# EAGLE board USB-to-RS485-Dynamixel_1.0 (EAGLE 7.6.0)
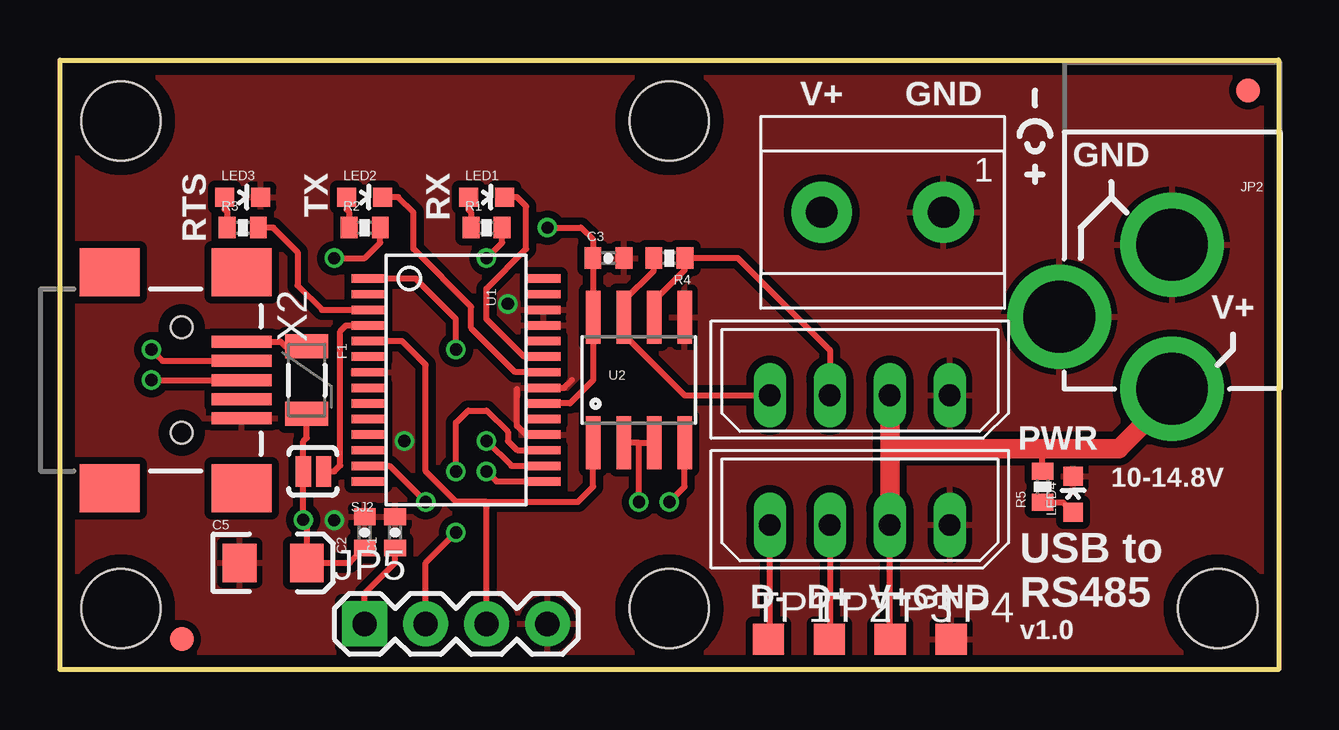
[diagram p0: board, top side]
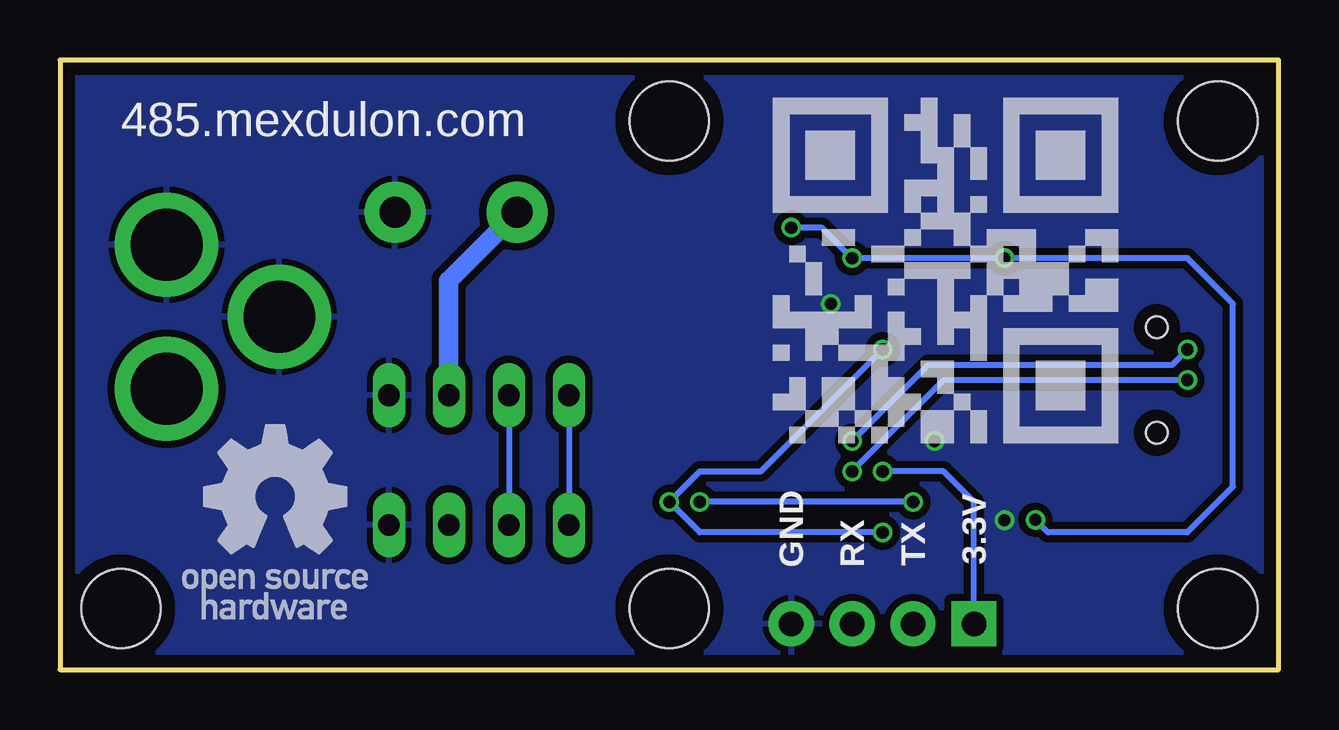
[diagram p1: board, bottom side, seen from below]

Size 50.8 x 25.4 mm. Coordinates in mm from the lower left corner, seen from the top.
Outline: 50.8,0 0,0 0,25.4 50.8,25.4 50.8,0
Copper layers (1*16): Top 0.035mm / dielectric 1.6mm / Bottom 0.035mm
Design rules "Elecrow_2-layer_PCB_eagle_rule": minimum track width 6mil, minimum drill 12mil, track to track 6mil, track to pad 6mil, pad to pad 6mil, via to via 8mil, smd to smd 0mil, copper to edge 20mil, drill to drill 10mil, minimum pad ring 6mil, minimum via ring 6mil, stop-mask expansion 0mil, vias tented up to drill 100mil, thermal gap 10mil
Net classes: 0 default: width 0.203 mm; 1 power: width 0.254 mm

## Footprints (pad centres in the part's own frame; a part is rotated, then mirrored left to right if it is on the bottom)
0402-CAP = smd 0.7 x 0.9: 1 -0.65,0; 2 0.65,0
EIA3216 = smd 1.4 x 1.6: A 1.4,0; C -1.4,0
PTC-1206 = smd 1 x 1.8: 1 -1.4,0; 2 1.4,0
STAND-OFF = hole 3.302: 0,0
POWER_JACK_PTH = drill 2.997 pad 4.318: GND 0,7.7; GNDBREAK 4.7,10.7; PWR 0,13.7
1X02_BIG_5.08 = drill 1.3 pad 2.54: 1 -2.54,0; 2 2.54,0
1X04 = drill 1.016 pad 1.88 square: 1 0,0 | drill 1.016 pad 1.88: 2 2.54,0; 3 5.08,0; 4 7.62,0
FIDUCIAL-1X2 = smd 1 x 1: 1 0,0
LED-0603 = smd 0.8 x 0.8: A 0,-0.75; C 0,0.75
MOLEX-22035045 = drill 0.9 long: P$1 -3.75,0; P$2 -1.25,0; P$3 1.25,0; P$4 3.75,0
0402-RES = smd 0.7 x 0.9: 1 -0.65,0; 2 0.65,0
SJ_2S-NOTRACE = smd 0.635 x 1.27: 1 -0.45,0; 2 0.4,0
TP13SQ = smd 1.3 x 1.3: TP 0,0
SSOP28DB = smd 0.348 x 1.397: 1 -4.225,-3.656; 2 -3.575,-3.656; 3 -2.925,-3.656; 4 -2.275,-3.656; 5 -1.625,-3.656; 6 -0.975,-3.656; 7 -0.325,-3.656; 8 0.325,-3.656; 9 0.975,-3.656; 10 1.625,-3.656; 11 2.275,-3.656; 12 2.925,-3.656; 13 3.575,-3.656; 14 4.225,-3.656; 15 4.225,3.656; 16 3.575,3.656; 17 2.925,3.656; 18 2.275,3.656; 19 1.625,3.656; 20 0.975,3.656; 21 0.325,3.656; 22 -0.325,3.656; 23 -0.975,3.656; 24 -1.625,3.656; 25 -2.275,3.656; 26 -2.925,3.656; 27 -3.575,3.656; 28 -4.225,3.656
SO08 = smd 0.61 x 2.21: 1 -1.905,-2.616; 2 -0.635,-2.616; 3 0.635,-2.616; 4 1.905,-2.616; 5 1.905,2.616; 6 0.635,2.616; 7 -0.635,2.616; 8 -1.905,2.616
USB-MINIB = smd 2.5 x 0.5: D+ 2.5,0; D- 2.5,0.8; GND 2.5,-1.6; ID 2.5,-0.8; VBUS 2.5,1.6 | smd 2.5 x 2: GND@1 -3,-4.5; GND@2 -3,4.5; GND@3 2.5,4.5; GND@4 2.5,-4.5 | hole 0.9: 0,2.2; 0,-2.2

## Placement (x,y rotation side)
C1  0.1uF  [0402-CAP]  13.97,5.71 90 top
C2  0.1uF  [0402-CAP]  12.7,5.71 90 top
C3  0.1uF  [0402-CAP]  22.86,17.14 0 top
C5  10uF  [EIA3216]  8.89,4.45 0 top
F1  500mA  [PTC-1206]  10.29,12.06 270 top
JP1  STAND-OFF  [STAND-OFF]  2.54,22.86 0 top
JP2  POWER_JACKPTH  [POWER_JACK_PTH]  46.35,25.4 180 top
JP3  STAND-OFF  [STAND-OFF]  48.26,2.54 0 top
JP4  Power  [1X02_BIG_5.08]  34.29,19.05 180 top
JP5  [1X04]  12.7,1.91 0 top
JP6  STAND-OFF  [STAND-OFF]  2.54,2.54 0 top
JP7  STAND-OFF  [STAND-OFF]  25.4,22.86 0 top
JP8  STAND-OFF  [STAND-OFF]  25.4,2.54 0 top
JP9  FIDUCIAL1X2  [FIDUCIAL-1X2]  5.08,1.27 0 top
JP10  FIDUCIAL1X2  [FIDUCIAL-1X2]  49.53,24.13 0 top
LED1  Red  [LED-0603]  17.78,19.68 270 top
LED2  Green  [LED-0603]  12.7,19.68 270 top
LED3  Green  [LED-0603]  7.62,19.68 270 top
LED4  Green  [LED-0603]  42.23,7.3 0 top
P1  CON-4-  [MOLEX-22035045]  33.34,11.43 180 top
P2  CON-4-  [MOLEX-22035045]  33.34,6.03 180 top
R1  330  [0402-RES]  17.78,18.41 0 top
R2  330  [0402-RES]  12.7,18.41 0 top
R3  330  [0402-RES]  7.62,18.41 0 top
R4  220  [0402-RES]  25.4,17.14 180 top
R5  1k  [0402-RES]  40.96,7.62 90 top
SJ2  SOLDERJUMPERNC2  [SJ_2S-NOTRACE]  10.54,8.26 180 top
TP1  TPSTP13SQ  [TP13SQ]  29.53,1.27 0 top
TP2  TPSTP13SQ  [TP13SQ]  32.07,1.27 0 top
TP3  TPSTP13SQ  [TP13SQ]  34.61,1.27 0 top
TP4  TPSTP13SQ  [TP13SQ]  37.15,1.27 0 top
U1  FT232R  [SSOP28DB]  16.51,12.06 270 top
U2  RS485  [SO08]  24.13,12.06 0 top
U$1  CREATIVE_COMMONS  [CREATIVE_COMMONS]  20.32,-8.89 0 top  (outside the outline)
X2  USBSMD  [USB-MINIB]  5.08,12.06 0 top

## Library data of the parts
C1-C3 C5 F1 JP1 JP3 JP5-JP10 LED1-LED4 R1-R5 SJ2 U1 U2 U$1 X2 = SparkFun
JP2 = SparkFun-Connectors; PROD_ID: CONN-08197
JP4 = SparkFun-Connectors
P1 P2 = 01-my-con
TP1-TP4 = testpad

## Nets
3.3V [power]: C1.1 JP5.1 U1.17
A: P1.P$3 P2.P$3 R4.1 TP2.TP U2.6
B: P1.P$4 P2.P$4 R4.2 TP1.TP U2.7
CTS: U1.11
DCD: U1.10
DSR: U1.9
DTR: U1.2
GND [power]: C1.2 C2.2 C3.2 C5.C JP2.GND JP2.GNDBREAK JP4.1 JP5.4 LED3.C LED4.C P1.P$1 P2.P$1 TP4.TP U1.7 U1.18 U1.21 U1.25 U1.26 U2.5 X2.GND
N$1: LED1.A R1.1
N$2: LED2.A R2.1
N$3: F1.1 X2.VBUS
N$4: LED3.A R3.1
N$5: LED4.A R5.1
PWREN: U1.14
RI: U1.6
RTS: R3.2 U1.3
RX-I: JP5.3 U1.5 U2.1
RXLED: LED2.C U1.22
SLEEP: U1.12
TX-O: JP5.2 U1.1 U2.4
TXDEN: U1.13 U2.2 U2.3
TXLED: LED1.C U1.23
USB_D+: U1.15 X2.D+
USB_D-: U1.16 X2.D-
V+: JP2.PWR JP4.2 P1.P$2 P2.P$2 R5.2 TP3.TP
VCC [power]: C2.1 C3.1 C5.A F1.2 R1.2 R2.2 SJ2.2 U1.20 U2.8
VCCIO: SJ2.1 U1.4

## Tracks (layer width: path | path; a pad name or v marks a point on that pad's centre or on a via)
3.3V  (via drill 0.51)
  Top 0.254: C1.1 13.97,4.45 12.7,3.17 JP5.1 | v16.51,8.26 16.51,10.29 17.02,10.79 17.78,10.79 18.67,9.91 18.67,9.53 19.05,9.14 U1.17
  Bottom 0.254: v16.51,8.26 13.97,8.26 12.7,6.99 JP5.1
A
  Top 0.254: U2.6 24.77,15.37 26.05,16.65 R4.1 28.26,17.14 32.07,13.34 32.09,13.34 P1.P$3 | P2.P$3 32.09,1.29 TP2.TP
  Bottom 0.254: P1.P$3 P2.P$3
B
  Top 0.254: U2.7 23.5,15.37 24.75,16.62 R4.2 | 23.5,13.97 26.04,11.43 P1.P$4 | TP1.TP 29.59,1.27 P2.P$4
  Top 0.305: 23.5,13.97 U2.7
  Bottom 0.254: P1.P$4 P2.P$4
GND  (via drill 0.51)
  Top 0.254: U1.21 21.01,11.74 21.34,12.06 | U1.18 19.42,9.79 19.05,10.16 19.05,11.68
  other vias: 18.67,15.24 11.43,6.22 14.35,9.53
  pour Bottom (isolate 0.305): 50.8,25.4 50.8,0 0,0 0,25.4
  pour Top (isolate 0.305): 50.8,25.4 50.8,0 0,0 0,25.4
N$1
  Top 0.254: R1.1 17.13,19.07 17.02,19.18 17.02,19.67 LED1.A
N$2
  Top 0.254: R2.1 12.05,19.07 11.94,19.18 11.94,19.67 LED2.A
N$3
  Top 0.254: X2.VBUS 9.2,13.66 9.4,13.46 10.54,13.46 F1.1
N$4
  Top 0.254: R3.1 6.97,19.07 6.86,19.18 6.86,19.67 LED3.A
N$5
  Top 0.254: R5.1 41.81,6.97 LED4.A
RTS
  Top 0.254: U1.3 10.92,14.99 9.91,16 9.91,17.4 8.89,18.41 R3.2
RX-I
  Top 0.254: U2.1 22.23,7.62 21.59,6.99 17.78,6.99 | 17.78,6.99 16.51,6.99 15.24,8.26 15.24,12.7 14.25,13.69 U1.5 | JP5.3 17.78,6.99
RXLED
  Top 0.254: U1.22 18.98,12.39 17.14,14.22 17.14,15.11 14.73,17.53 14.73,19.05 14.1,19.68 LED2.C
TX-O  (via drill 0.51)
  Top 0.254: JP5.2 15.24,4.45 v16.51,5.71 | v16.51,13.34 16.51,14.61 14.82,16.29 U1.1 | U2.4 26.04,7.62 v25.4,6.99
  Bottom 0.254: v16.51,13.34 21.59,8.26 24.13,8.26 v25.4,6.99 24.13,5.71 v16.51,5.71
TXDEN  (via drill 0.51)
  Top 0.254: 24.13,9.45 U2.2 | 24.13,9.45 U2.3 | U1.13 13.73,8.49 v15.24,6.99 | v24.13,6.99 24.13,9.45
  Bottom 0.254: v15.24,6.99 v24.13,6.99
TXLED
  Top 0.254: U1.23 19.34,13.04 17.78,14.61 17.78,15.88 19.43,17.53 19.43,19.3 19.05,19.68 LED1.C
USB_D+  (via drill 0.51)
  Top 0.254: v3.81,12.06 X2.D+ | U1.15 18.2,7.84 v17.78,8.26
  Bottom 0.254: v3.81,12.06 13.97,12.06 v17.78,8.26
USB_D-  (via drill 0.51)
  Top 0.254: U1.16 18.82,8.49 v17.78,9.53 | X2.D- 4.28,12.87 v3.81,13.34
  Bottom 0.254: v17.78,9.53 14.61,12.7 4.45,12.7 v3.81,13.34
V+
  Top 0.254: TP3.TP 34.59,1.27 P2.P$2 | R5.2 40.96,9.21
  Top 0.813: JP2.PWR 46.35,11.43 44.13,9.21 40.96,9.21 34.59,9.21 | 34.59,9.21 P1.P$2 | P2.P$2 34.59,9.21
  Bottom 0.813: JP4.2 34.61,16.19 34.61,12.09 P1.P$2
VCC  (via drill 0.51)
  Top 0.254: U1.20 21.25,11.09 22.23,12.06 U2.8 22.23,17.13 C3.1 22.21,17.92 21.72,18.41 v20.32,18.41 | R2.2 13.35,17.8 12.7,17.14 v11.43,17.14 | R1.2 18.43,17.8 v17.78,17.14 | C2.1 12.08,4.45 C5.A 10.29,6.09 v10.14,6.24 SJ2.2 10.14,9.51 10.29,9.65 F1.2
  Bottom 0.254: v10.14,6.24 9.61,5.71 3.81,5.71 1.91,7.62 1.91,15.24 3.81,17.14 v11.43,17.14 v17.78,17.14 19.05,18.41 v20.32,18.41
VCCIO
  Top 0.254: SJ2.1 11.43,8.26 11.68,8.51 11.68,14.1 11.93,14.34 U1.4

## Text on the board
tPlace: V+ | GND | RTS | TX | RX | GND | V+ | PWR | 10-14.8V | USB to | D- | D+ | V+ | GND | RS485 | v1.0
bNames: 485.mexdulon.com | 3.3V | TX | RX | GND
tDocu: N. Seidle | Modified by: Oliver Krebs